# Altium PCB PCB_STM32.PcbDoc
Units mm, origin at the board's own origin, x right, y up, seen from the top; angles counter-clockwise.
Board outline 37 x 38 mm, 4 copper layers (L1(Signal), L2(GND), L3(GND), L4(Signal)), stack 1.57 mm thick; 35 components, 28 nets, 170 pads, 132 vias.
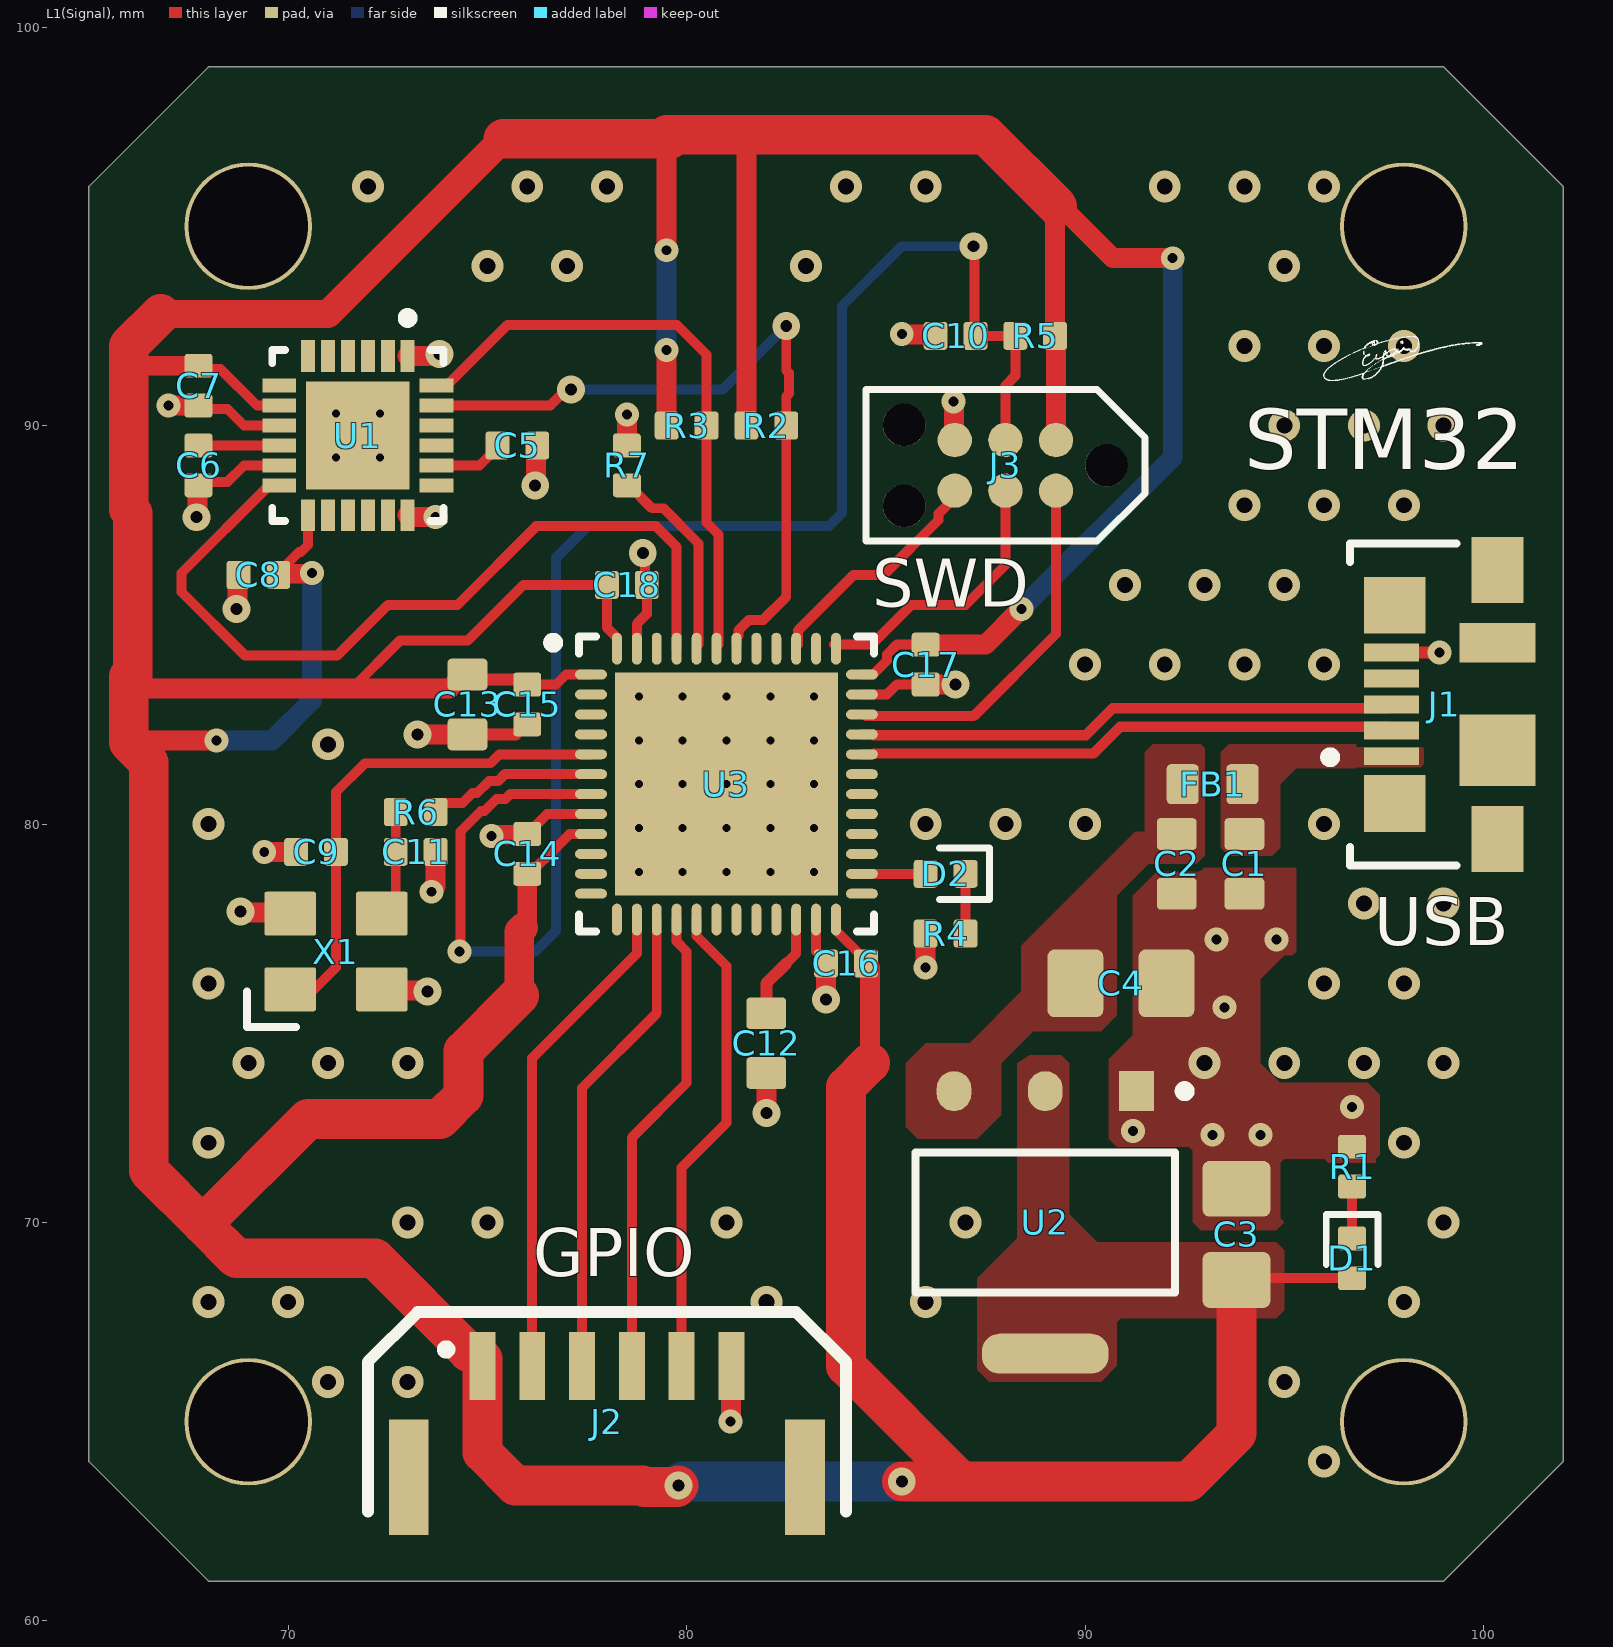
[diagram p0: L1(Signal) view]
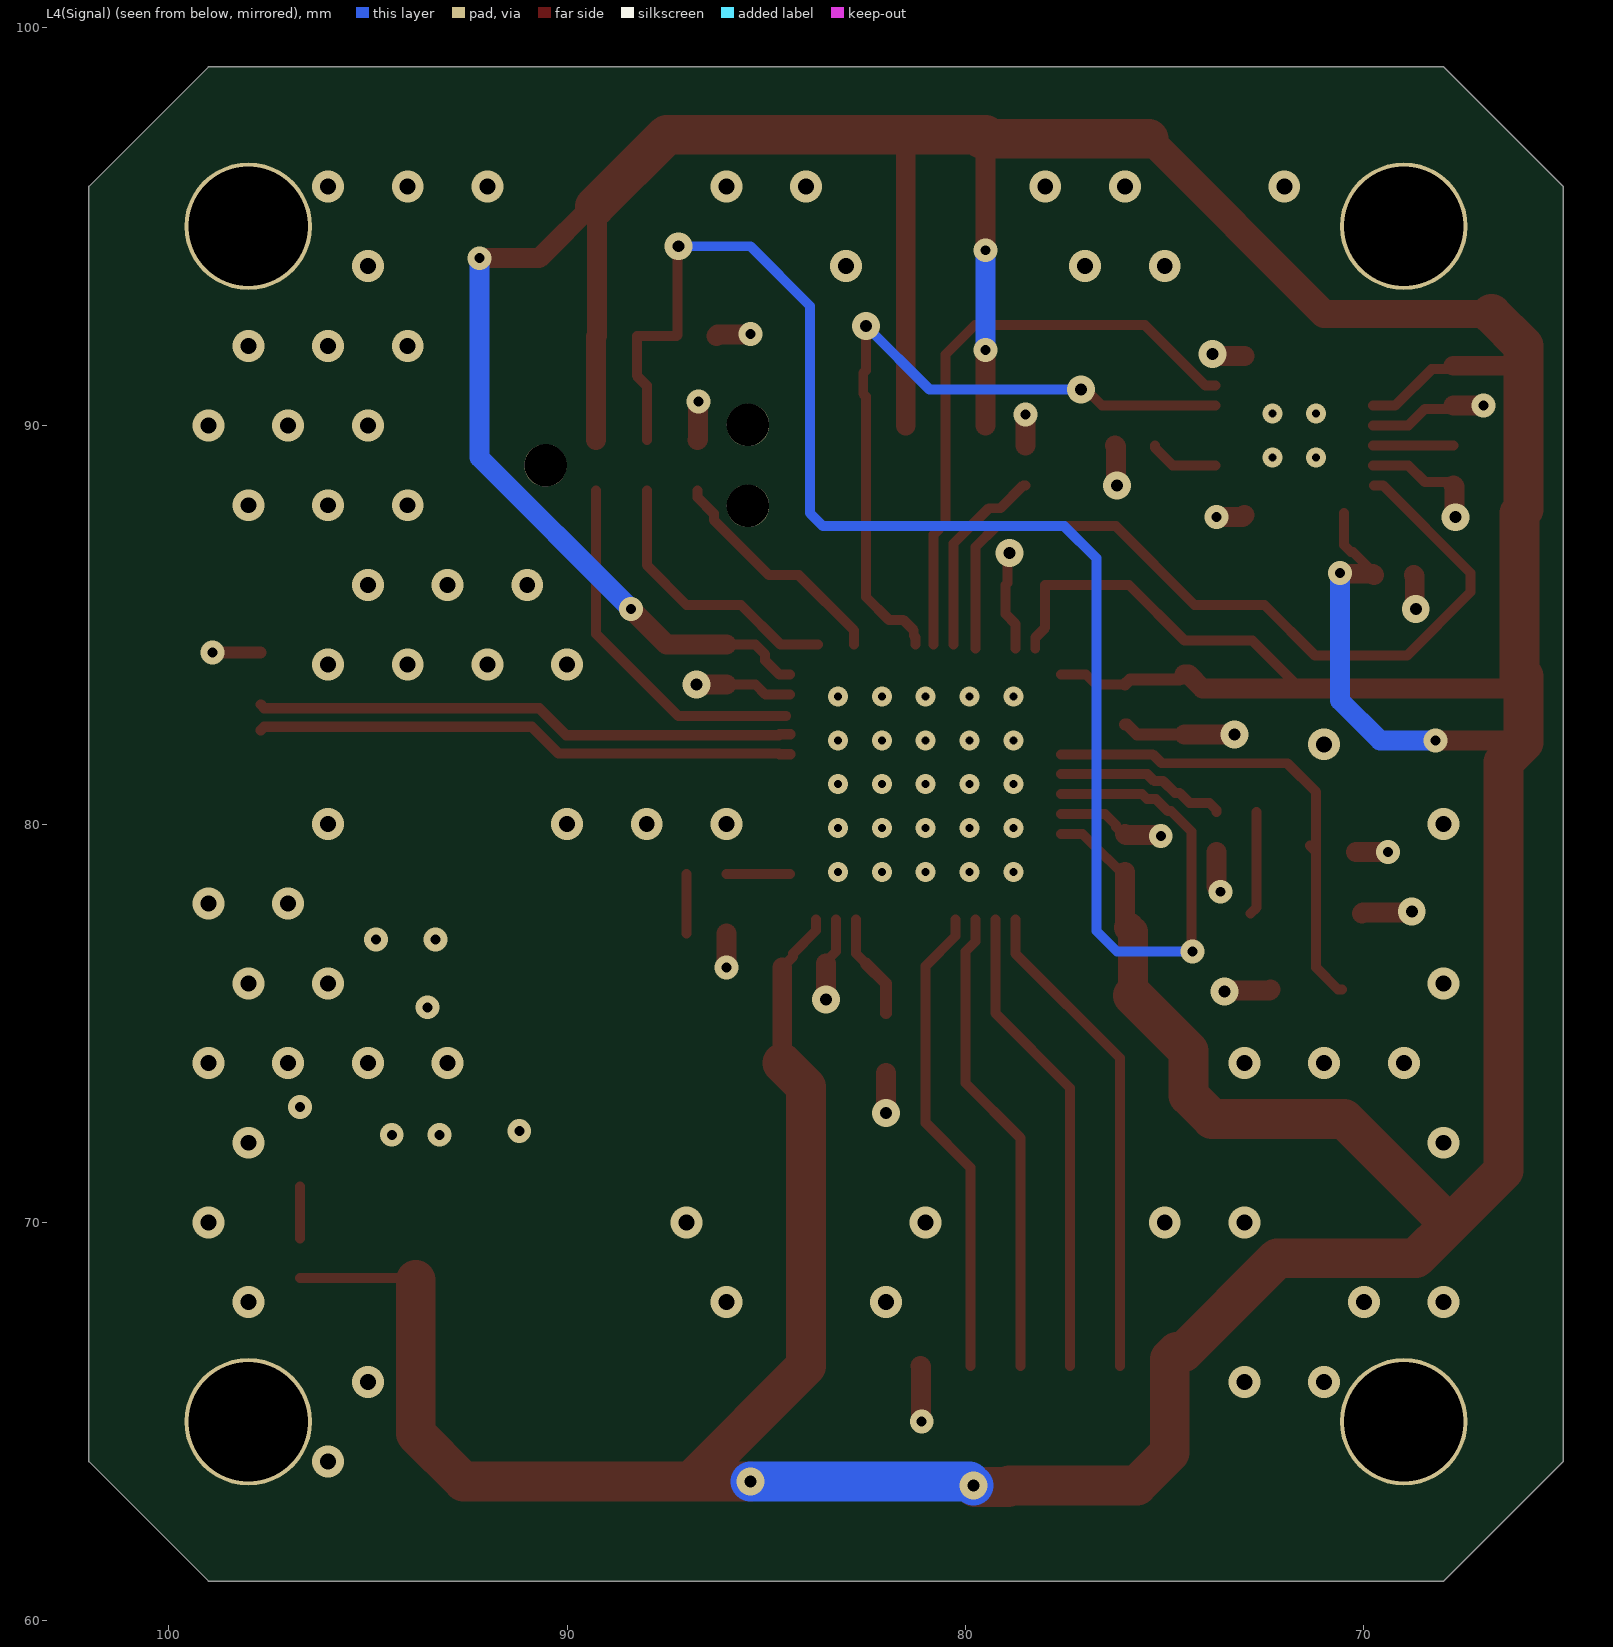
[diagram p1: L4(Signal) view, seen from below]
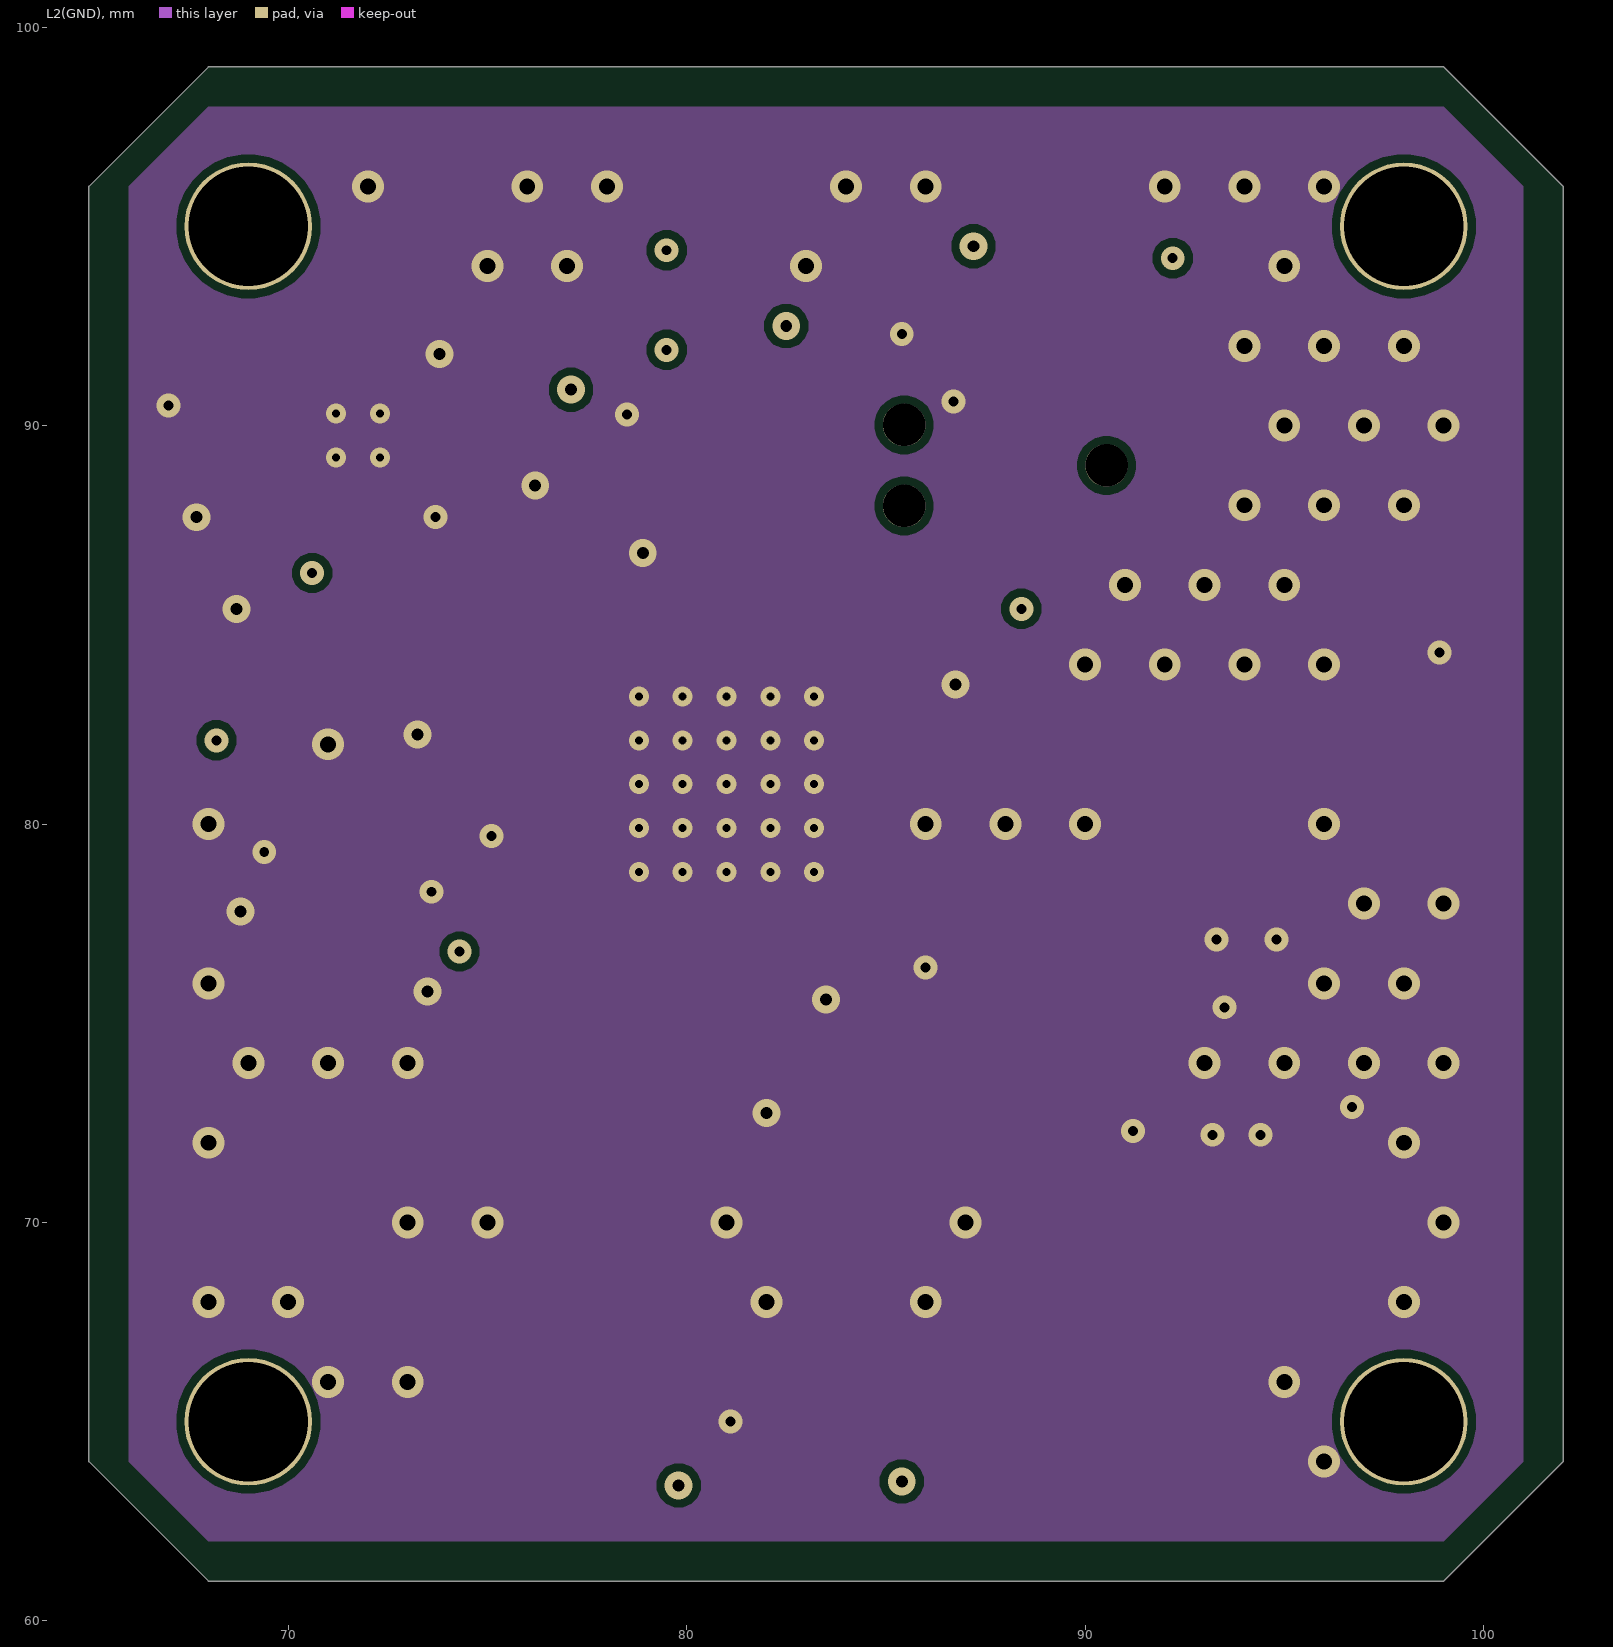
[diagram p2: L2(GND)]
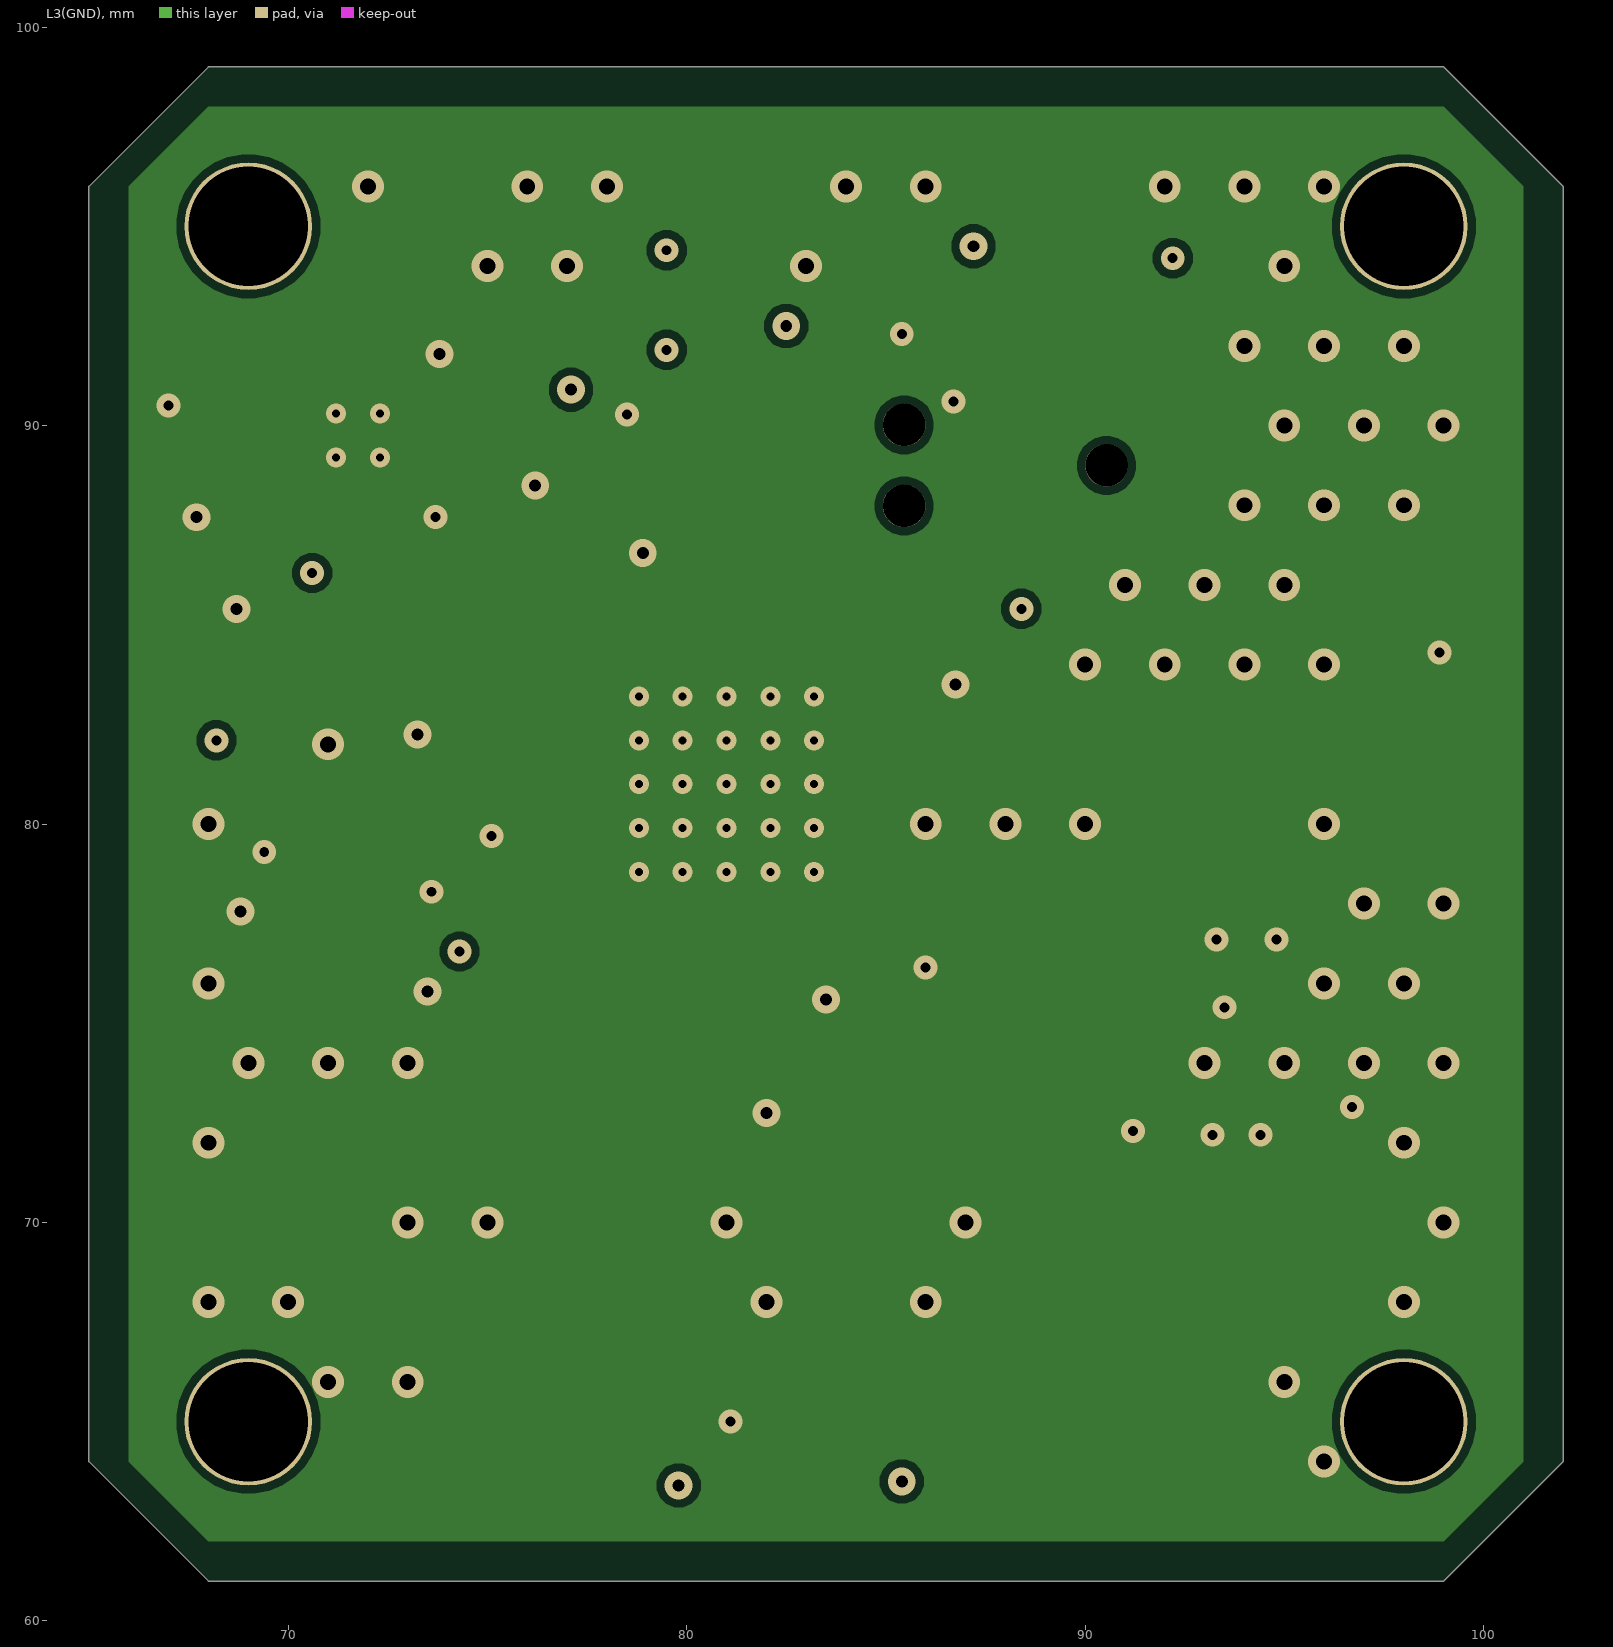
[diagram p3: L3(GND)]
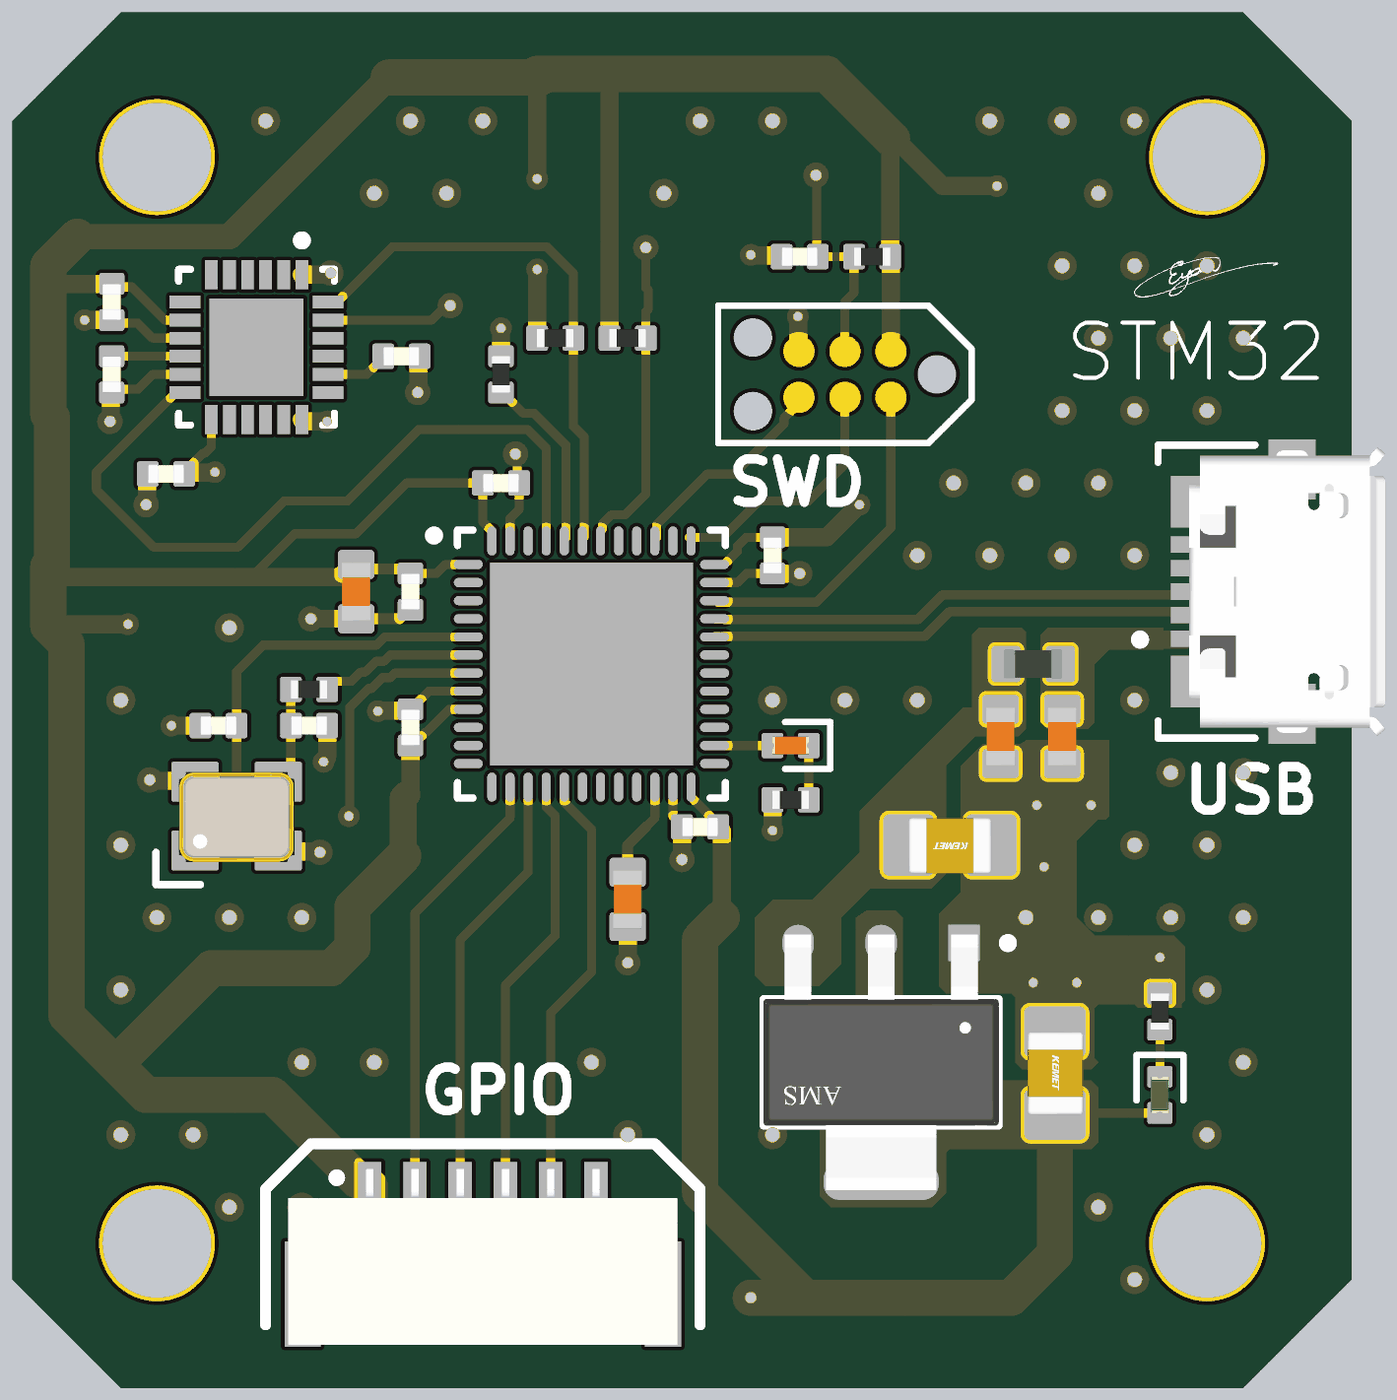
[diagram p4: 3D render of the assembled board from above, using the file's embedded part models]

## Layer stack, top to bottom
Top Solder: solder mask 0.035, SM-001, Dk 4
L1(Signal): signal copper 0.035
Dielectric 1: prepreg 0.2, PP-017, Dk 4.6
L2(GND): signal copper 0.0175
Dielectric 3: core 1.065, Core-039, Dk 4.6
L3(GND): signal copper 0.0175
Dielectric 5: prepreg 0.2, PP-017, Dk 4.6
L4(Signal): signal copper 0.035
Bottom Solder: solder mask 0.035, SM-001, Dk 4

## Board outline
65,64 65,96 68,99 99,99 102,96 102,64 99,61 68,61

## Design rules (kind name [scope] priority, off if disabled: settings)
Clearance [All] p1: gap=0.2 ignorepadtopadclearanceinfootprint=FALSE
DiffPairsRouting [All] p1: maxlimit=0.254 minlimit=0.203 mostfreqgap=0.254 toplayer_maxgap=0.203 toplayer_prefgap=0.203 toplayer_minwidth=0.26 toplayer_maxwidth=0.26 toplayer_prefwidth=0.26 midlayer1_mingap=0.254 midlayer1_minwidth=0.381 midlayer1_maxwidth=0.381 midlayer1_prefwidth=0.381 midlayer2_mingap=0.254 midlayer2_minwidth=0.381 midlayer2_maxwidth=0.381 midlayer2_prefwidth=0.381 bottomlayer_maxgap=0.203 bottomlayer_prefgap=0.203 bottomlayer_minwidth=0.26 bottomlayer_maxwidth=0.26 bottomlayer_prefwidth=0.26 maxuncoupledlength=12.7
PolygonConnect [All] p1: connectstyle=Direct reliefconductorwidth=0.254 reliefentries=4 polygonreliefangle="90 Angle" airgapwidth=0.254
RoutingVias [All] p1: holewidth=0.3 width=0.7 viastyle="Through Hole" minholewidth=0.25 minwidth=0.55 maxholewidth=0.4 maxwidth=0.9
SolderMaskExpansion [All] p1: expansion=0.102 istentingtop=FALSE
SupplyNets "Schematic Supply Nets_4" [InNet('+3.3 V')] p1: voltage=0.000
SupplyNets "Schematic Supply Nets_3" [InNet('VBUS')] p2: voltage=0.000
SupplyNets "Schematic Supply Nets_2" [InNet('GND')] p3: voltage=0.000
SupplyNets "Schematic Supply Nets_1" [InNet('+3.3v')] p4: voltage=0.000
SupplyNets "Schematic Supply Nets" [InNet('+5V')] p5: voltage=0.000
UnRoutedNet [All] p1: checkbadconnections=TRUE
Width [All] p1: maxlimit=1 minlimit=0.2 preferedwidth=0.3 midlayer1_minwidth=0.254 midlayer1_maxwidth=0.254 midlayer1_prefwidth=0.254 midlayer2_minwidth=0.254 midlayer2_maxwidth=0.254 midlayer2_prefwidth=0.254 minimp=50.000000 maximp=50.000000 favimp=50.000000
28 further rules are at their usual default settings.

## Classes and differential pairs
differential pair "USB D": +"USB D_P" -"USB D_N"

## Components (designator, comment, footprint, x,y, rotation, side; value= is the part's Value field where it differs from the comment)
C1 "2.2u" CAP_0603 94,79 r90 top
C2 "2.2u" CAP_0603 92.3,79 r90 top
C3 "22u" CAP_0805 93.8,69.7 r270 top
C4 "22u" CAP_0805 90.9,76 r180 top
C5 "2.2n" CAP_0402 75.75,89.5 r180 top
C6 "100n" CAP_0402 67.75,89 r90 top
C7 "10n" CAP_0402 67.75,91 r90 top
C8 "100n" CAP_0402 69.25,86.25 r0 top
C9 "10p" CAP_0402 70.7,79.3 r0 top
C10 "100n" CAP_0402 86.75,92.25 r0 top
C11 "10p" CAP_0402 73.2,79.3 r180 top
C12 "2.2u" CAP_0603 82,74.5 r90 top
C13 "2.2u" CAP_0603 74.5,83 r90 top
C14 "100n" CAP_0402 76,79.25 r270 top
C15 "100n" CAP_0402 76,83 r90 top
C16 "100n" CAP_0402 84,76.5 r0 top
C17 "100n" CAP_0402 86,84 r90 top
C18 "100n" CAP_0402 78.5,86 r180 top
D1 "GREEN" LED_0402_GREEN 96.7,69.1 r90 top
D2 "RED" LED_0402_RED 86.5,78.75 r0 top
FB1 "120R" FB_0603 93.2,81 r180 top
J1 "473460001" FP-473460001-MFG 100,83 r90 top
J2 "SM06B-GHS-TB" SM06B-GHS-TB 78,65 r0 top
J3 "TC2030-NL" TC2030-NL-FP 88,89 r180 top
R1 "1k" RES_0402 96.7,71.4 r270 top
R2 "2.2k" RES_0402 82,90 r180 top
R3 "2.2k" RES_0402 80,90 r180 top
R4 "1k" RES_0402 86.5,77.25 r0 top
R5 "10k" RES_0402 88.75,92.25 r0 top
R6 "10k" RES_0402 73.2,80.3 r180 top
R7 "10k" RES_0402 78.5,89 r270 top
U1 "MPU-6050" IS-QFN-24_V 71.75,89.75 r270 top
U2 "AMS1117-3.3" FP-AMS1117-IPC_C 89,70 r270 top
U3 "STM32F411CEU6" STM-UFQFPN48_L 81,81 r0 top
X1 "24MHz" XTAL_3225 71.2,76.8 r0 top

## Footprints (in the part's own frame and the unit in brackets; to place one, negate y for a bottom-side part, rotate by r counter-clockwise, add the part's x,y. Pads: shape width x height; smd on the part's side, far side on the other; paste and mask are expansions set on the pad)
CAP_0402 [mm]
  rrect25% 0.6x0.7 smd: 1(-0.5,0) 2(0.5,0)
  body extent -0.5,-0.26 0.5,0.26, height 0.37
CAP_0603 [mm]
  rrect25% 0.8x1 smd: 1(-0.75,0) 2(0.75,0)
  body extent -0.8,-0.4 0.8,0.4, height 0.51
CAP_0805 [mm]
  rrect25% 1.4x1.7 smd: 1(-1.143,0) 2(1.143,0)
  body extent -1.15,-0.76 1.15,0.79, height 1.01
FB_0603 [mm]
  rrect25% 0.8x1 smd: 1(-0.75,0) 2(0.75,0)
  body extent -0.8,-0.4 0.8,0.4, height 0.81
FP-473460001-MFG [mm]
  rect 0.45x1.38 smd paste+0 mask+0: 1(-1.3,2.31) 2(-0.65,2.31) 3(0,2.31) 4(0.65,2.31) 5(1.3,2.31)
  rect 1.425x1.55 smd paste+0 mask+0: 6(-2.488,2.225) 7(2.488,2.225)
  rect 1.65x1.3 smd paste+0 mask+0: 8(-3.375,-0.35) 11(3.375,-0.35)
  rect 1.8x1.9 smd paste+0 mask+0: 9(-1.15,-0.35)
  rect 1x1.9 smd paste+0 mask+0: 10(1.55,-0.35)
  silkscreen extent -4.05,0.67 4.05,3.97, body extent -4.3,-2.48 4.3,3.45, height 0.25
FP-AMS1117-IPC_C [mm]
  rect 1.004x0.872 smd paste+0 mask+0: 1(-3.295,2.29)
  rrect100% 1.004x0.872 smd paste+0 mask+0: 2(-3.295,0) 3(-3.295,-2.29)
  rrect87% 1.004x3.182 smd paste+0 mask+0: 4(3.295,0)
  silkscreen extent -3.42,-3.25 1.75,3.63, body extent -3.9,-3.35 3.9,3.35, height 0.25
IS-QFN-24_V [mm] "QFN, 24-Leads, Body 4x4mm, Pitch 0.5mm, Thermal Pad 2.7x2.6mm"
  rect 0.8x0.35 smd: 1(-2,1.25) 2(-2,0.75) 3(-2,0.25) 4(-2,-0.25) 5(-2,-0.75) 6(-2,-1.25) 13(2,-1.25) 14(2,-0.75) 15(2,-0.25) 16(2,0.25) 17(2,0.75) 18(2,1.25)
  rect 0.35x0.85 smd mask+0.102: 7(-1.25,-1.975) 8(-0.75,-1.975) 9(-0.25,-1.975) 10(0.25,-1.975) 11(0.75,-1.975) 12(1.25,-1.975) 19(1.25,1.975) 20(0.75,1.975) 21(0.25,1.975) 22(-0.25,1.975) 23(-0.75,1.975) 24(-1.25,1.975)
  rect 2.7x2.6 smd: 25(0,0)
  silkscreen extent -3.07,-2.15 2.15,2.15, body extent -2,-2 2,2, height 0.95
LED_0402_GREEN [mm]
  rrect25% 0.6x0.7 smd: A(-0.5,0) K(0.5,0)
  silkscreen extent -0.15,-0.65 1.1,0.65, body extent -0.51,-0.25 0.51,0.25, height 0.45
LED_0402_RED [mm]
  rrect25% 0.6x0.7 smd: A(-0.5,0) K(0.5,0)
  silkscreen extent -0.15,-0.65 1.1,0.65, body extent -0.51,-0.25 0.51,0.25, height 0.45
RES_0402 [mm]
  rrect25% 0.6x0.7 smd: 1(-0.5,0) 2(0.5,0)
  body extent -0.5,-0.25 0.5,0.25, height 0.3
SM06B-GHS-TB [mm]
  rect 0.65x1.7 smd: 1(-3.125,1.4) 2(-1.875,1.4) 3(-0.625,1.4) 4(0.625,1.4) 5(1.875,1.4) 6(3.125,1.4)
  rect 1x2.9 smd: ""(-4.975,-1.4) ""(4.975,-1.4)
  silkscreen extent -6,-2.25 6,2.75, body extent -5.38,-2.8 5.38,2.05, height 4.26
STM-UFQFPN48_L [mm] "QFN, 48-Leads, Body 7.1x7.1mm, Pitch 0.5mm, Thermal Pad 5.6x5.6mm, IPC High Density"
  oval 0.8x0.25 smd: 1(-3.4,2.75) 2(-3.4,2.25) 3(-3.4,1.75) 4(-3.4,1.25) 5(-3.4,0.75) 6(-3.4,0.25) 7(-3.4,-0.25) 8(-3.4,-0.75) 9(-3.4,-1.25) 10(-3.4,-1.75) 11(-3.4,-2.25) 12(-3.4,-2.75) 25(3.4,-2.75) 26(3.4,-2.25) 27(3.4,-1.75) 28(3.4,-1.25) 29(3.4,-0.75) 30(3.4,-0.25) 31(3.4,0.25) 32(3.4,0.75) 33(3.4,1.25) 34(3.4,1.75) 35(3.4,2.25) 36(3.4,2.75)
  oval 0.25x0.8 smd: 13(-2.75,-3.4) 14(-2.25,-3.4) 15(-1.75,-3.4) 16(-1.25,-3.4) 17(-0.75,-3.4) 18(-0.25,-3.4) 19(0.25,-3.4) 20(0.75,-3.4) 21(1.25,-3.4) 22(1.75,-3.4) 23(2.25,-3.4) 24(2.75,-3.4) 37(2.75,3.4) 38(2.25,3.4) 39(1.75,3.4) 40(1.25,3.4) 41(0.75,3.4) 42(0.25,3.4) 43(-0.25,3.4) 44(-0.75,3.4) 45(-1.25,3.4) 46(-1.75,3.4) 47(-2.25,3.4) 48(-2.75,3.4)
  rect 5.6x5.6 smd: 49(0,0)
  silkscreen extent -4.47,-3.7 3.7,3.7, body extent -3.55,-3.55 3.55,3.55, height 0.6
TC2030-NL-FP [mil]
  round 33.98 smd paste-16.99: 1(-50,-25) 2(-50,25) 3(0,-25) 4(0,25) 5(50,-25) 6(50,25)
  round 42.01 hole 42.01 unplated: MH(-100,0) MH(100,-40) MH(100,40)
  silkscreen extent -138,-75 138,75
XTAL_3225 [mm]
  rrect10% 1.3x1.1 smd: 1(-1.15,-0.95) 2(1.15,-0.95) 3(1.15,0.95) 4(-1.15,0.95)
  silkscreen extent -2.23,-1.89 -1,-1, body extent -1.6,-1.28 1.6,1.22, height 0.61

## Part data
C1 C2 C12 C13: library part CAP_0603, "Capacitor SMD 0603"
C3 C4: library part CAP_0805, "Capacitor SMD 0805"
C5 C6 C7 C8 C9 C10 C11 C14 C15 C16 C17 C18: library part CAP_0402, "Capacitor SMD 0402"
D1: library part LED_0402_GREEN, "LED 0402 GREEN SMD"
D2: library part LED_0402_RED, "LED 0402 RED SMD"
FB1: library part FB_0603, "Ferrite Bead SMD 0603"
J1: library part CMP-2000-05246-2, "CONN RCPT USB2.0 MICRO B SMD R/A", Current Rating=1.8A, Manufacturer=Molex, Package=0, Temperature="-30°C to +85°C", Temperature Range High=+85°C, Temperature Range Low=-30°C, Voltage Rating=30V, Automotive=No, Category=Conn, ComponentLink2Description=Datasheet, ComponentLink2URL=https://www.molex.com/webdocs/datasheets/pdf/en-us/0473460001_IO_CONNECTORS.pdf, Conn Orientation="Right Angle", Contact Material=Gold,Nickel, Device Class L1=Connectors, Device Class L2="USB Connectors", Device Class L3=unset, Digikey Description="CONN RCPT USB2.0 MICRO B SMD R/A", Footprint Url=https://www.molex.com/pdm_docs/sd/473460001_sd.pdf, Height=2.945mm, Is Female=yes, Lead Free=Yes, Manufacturer Part Number=473460001, Number Of Contacts=5, Octopart=https://octopart.com/47346-0001-molex-7164928, Pitch=0.65mm, RoHS=TRUE, Shielding=true, Usb Standard="USB 2.0"
J2: "Header Connector 6 Position 1.25MM Pitch SMD Horizontal JST GH", Manufacturer=JST, Manufacturer Part Number=SM06B-GHS-TB
J3: "Tag-Connect No-Solder SWD Debug Connector (No Legs) DO NOT PLACE", Manufacturer=Tag-Connect, Manufacturer Part Number=TC2030-NL-FP
R1 R2 R3 R4 R5 R6 R7: library part RES_0402, "Resistor SMD 0402"
U1: library part CMP-1753-00002-2, "3-Axis Gyroscope, Accelerometer and a Digital Motion Processor(TM) (DMP), 2.375 to 3.46 V, -40 to 85 degC, 24-Pin QFN, RoHS, Tape and Reel", Manufacturer=InvenSense, Standard Package=5,000, Category=Sensors,Transducers, Datasheet URL=http://datasheet.octopart.com/MPU-6050-InvenSense-datasheet-14421344.pdf, Datasheet Version="Rev. 3.3, 05/2012", Dynamic Catalog=MPU-6000™Series, Family=Multifunction, Featured Product=MPU-60506-Axis,IntegratedI²CSolution, Manufacturer URL=http://www.invensense.com/, Online Catalog=MPU-6000™Series, Other Names="1428-1007-2 / MPU6050", Output Type=Digital, Sensor Type=MotionTracking, Unit PriceUSD=Digital
U2: library part CMP-209535-000001-1, "LDO Voltage Regulators 1A, 3.3V", Dropout Voltage=1.1V, Manufacturer="Advanced Monolithic Systems", Max Junction Temp=+125°C, Max Power Dissipation=1.2W, Max Supply Voltage=15V, Nominal Supply Current=5mA, Output Current=1A, Output Voltage=3.3V, Package=AMS1117, Temperature="-40°C to +125°C", Temperature Range Low=-40°C, Automotive=No, Category=IC, ComponentLink2Description=Datasheet, ComponentLink2URL=http://www.advanced-monolithic.com/pdf/ds1117.pdf, Device Class L1="Integrated Circuits (ICs)", Device Class L2="Power Management ICs", Device Class L3="Voltage Regulators - Linear", Height=1.8mm, Ipc Land Pattern Name=SOT229P700X180-4, Lead Free=Yes, Manufacturer Part Number=AMS1117-3.3, Number Of Outputs=1, Octopart=https://octopart.com/ams1117-3.3-advanced+monolithic+systems-25899300, Output Type=Fixed, RoHS=TRUE, Standoff Height=0.64mm, Temperature Range High=+125°C
U3: library part CMP-0243-00165-1, "ARM Cortex-M4 32-bit MCU+FPU, 512 KB Flash, 128 KB RAM, 36 I/Os, 48-Pin UFQFPN, -40 to 85 degC, Tray", I/Os (High Current)=36, Operating Frequency(F) (Processor speed) (MHz)=100, Package Description=UFQFPN48, Package Reference="48-Pin Ultra Thin Fine Pitch Quad Flat No-Lead, 7 x 7 x 0.6 mm Body, 0.5 mm Pitch, Exposed Pad", Supply Voltage(Vcc) min (V)=1.7, ComponentLink1Description="Manufacturer URL", ComponentLink1URL=http://www.st.com/, ComponentLink2Description=Datasheet, ComponentLink2URL=http://www.st.com/st-web-ui/static/active/en/resource/technical/document/datasheet/DM00115249.pdf, Core="ARM Cortex-M4", DatasheetVersion="Rev. 6", FLASH Size (Prog) (kB)=512, Internal RAM Size (kB)=128, Mounting Technology="Surface Mount", Packing=Tray
X1: library part TSX-3225_24.0000MF15X-AC, "Crystal SMD 24MHz 10PPM 7pF 3225", Manufacturer=Epson, Manufacturer Part Number="TSX-3225 24.0000MF15X-AC"

## Free pads (board coordinates)
  round 3.2 hole 3 unplated paste-2539.97: 1(69,95) 2(98,95) 3(98,65) 4(69,65)

## Via types
v1: diameter 0.8, hole 0.4, L1(Signal) to L4(Signal), tented both sides, 62 vias
v2: diameter 0.5, hole 0.2, L1(Signal) to L4(Signal), 29 vias
v3: diameter 0.6, hole 0.25, L1(Signal) to L4(Signal), tented both sides, 25 vias
v4: diameter 0.7, hole 0.3, L1(Signal) to L4(Signal), tented both sides, 16 vias

## Nets (pads, with @x,y where several pads share a name; then routed paths per layer and width w, separated by ;. In a path a pad name is that pad's centre, name@x,y a point inside that pad or via, vN(x,y) a via of type N, cw(c..) or ccw(c..) an arc to the next point about the centre after c; other vN are vias at no path point)
"+3.3 V": 
+3.3v: C3.2 C7.2 C8.2 C13.2 C14.2 C15.2 C16.2 C17.2 C18.2 D1.A J2.1 J3.1 R2.2 R3.2 R5.2 U1.8 U1.13 U2.2 U2.4 U3.1 U3.9 U3.24 U3.36 U3.48 | length 193.8
  L1(Signal) w0.25: C7.2 67.836,91.414 68.301,91.414 69.215,90.5 U1.8 ; C8.2 69.75,86.3 70.273,86.823 70.323,86.823 70.5,87 U1.13@70.5,87.8 ; 71.6,83.4 72.8,84.6 74.5,84.6 75.9,86 C18.2 78,84.925 78.25,84.675 U3.48 ; C15.2 76.725,83.5 76.975,83.75 U3.1 ; C14.2@76.05,78.75 76.425,79.125 76.441,79.125 77.066,79.75 U3.9 ; U3.24 83.75,77.325 84.325,76.75 84.325,76.675 C16.2 ; U3.36 84.675,83.75 85.029,84.104 85.029,84.254 85.275,84.5 C17.2 ; C3.2@93.9,68.6 D1.A
  L1(Signal) w0.3: 66.1,83.7 66.15,83.75 ; C13.2 74.625,83.625 75.875,83.625 C15.2
  L1(Signal) w0.5: 66,82.1 v3(68.2,82.1) ; 66,83.4 71.6,83.4 74.05,83.4 74.4,83.75 C13.2 ; 66,91.6 66.1,91.5 C7.2 ; C8.2 69.781,86.281 70.581,86.281 v3(70.6,86.3) ; 75.9,77.4 76,77.5 C14.2 C14.2@76,78.8 ; R3.2 v3(79.5,91.9) ; v3(79.5,94.4) 79.5,97.3 ; 81.46,97.34 81.5,97.3 R2.2 ; 84.6,74 C16.2@84.6,76.4 ; C17.2 87.5,84.5 v3(88.4,85.4) ; 89.2,95.5 89.25,95.45 R5.2 ; J3.1 R5.2@89.27,92.23 ; 89.3,95.6 90.7,94.2 v3(92.2,94.2)
  L1(Signal) w0.7: 66.8,92.8 71,92.8 ; 71.05,92.85 75.4,97.2
  L1(Signal) w0.75: 75.8,75.7 75.8,77.3 75.9,77.4
  L1(Signal) w1: 66,83.7 66,83.4 66,82.1 66,82.05 66.5,81.55 66.5,71.3 67.85,69.95 ; 66.1,83.7 66.1,87.8 66,87.9 66,91.6 66,92 66.8,92.8 ; 75.4,97.2 79.6,97.2 ; 75.8,75.7 74.4,74.3 74.4,73.186 73.814,72.6 70.5,72.6 67.85,69.95 ; 79.5,97.3 81.5,97.3 87.5,97.3 89.3,95.5 ; v4(79.8,63.4) 79.764,63.364 78.936,63.364 78.9,63.4 75.7,63.4 74.875,64.225 J2.1 74.875,66.575 74.7,66.75 74.525,66.75 72.175,69.1 68.7,69.1 67.85,69.95 ; 84.6,74 84,73.4 84,66.4 86.9,63.5 ; v4(85.4,63.5) 86.9,63.5 ; C3.2 93.8,64.7 92.6,63.5 86.9,63.5
  L4(Signal) w0.5: v3(68.2,82.1) 69.6,82.1 70.6,83.1 v3(70.6,86.3) ; v3(79.5,91.9) v3(79.5,94.4) ; v3(88.4,85.4) 92.2,89.2 v3(92.2,94.2)
  L4(Signal) w1: v4(79.8,63.4) 79.9,63.5 v4(85.4,63.5)
+5V: C2.2 C4.2 FB1.2 U2.3
GND: C1.1 C2.1 C3.1 C4.1 C5.1 C6.1 C7.1 C8.1 C9.1 C10.1 C11.1 C12.1 C13.1 C14.1 C15.1 C16.1 C17.1 C18.1 J1.5 J2.6 J3.5 R1.1 R4.1 R7.1 U1.1 U1.9 U1.11 U1.18 U1.25 U2.1 U3.8 U3.23 U3.35 U3.47 U3.49 X1.2 X1.4 | length 33.5
  L1(Signal) w0.25: C6.1 67.838,88.588 68.475,88.588 68.887,89 U1.11 ; C7.1 67.837,90.413 68.475,90.413 68.888,90 U1.9 ; C14.1@76.05,79.75 76.225,79.925 76.225,79.975 76.5,80.25 U3.8 ; U3.47 78.75,85.025 79,85.275 C18.1 78.95,86.05 78.95,86.75 v4(78.9,86.8) ; U3.23 83.25,76.8 83.5,76.55 C16.1 ; U3.35 85.025,83.25 85.275,83.5 C17.1
  L1(Signal) w0.3: C13.1 75.7,82.25 75.95,82.5 C15.1 ; J1.5 v3(98.9,84.3)
  L1(Signal) w0.5: v3(67,90.5) C7.1 ; v4(67.7,87.7) 67.725,87.725 67.725,88.475 C6.1 ; v4(68.7,85.4) 68.725,85.425 68.725,86.225 C8.1 ; v4(68.8,77.8) 68.825,77.775 70.025,77.775 X1.4 ; v3(69.4,79.3) C9.1 ; X1.2 72.375,75.825 73.475,75.825 v4(73.5,75.8) ; U1.18 73.05,87.7 v3(73.7,87.7) ; U1.1 73.696,91.75 73.746,91.8 v4(73.8,91.8) ; v4(73.25,82.25) C13.1 ; v3(73.6,78.3) 73.6,78.327 73.7,78.427 C11.1 ; v3(75.1,79.7) 75.119,79.719 75.969,79.719 C14.1 ; v4(76.2,88.5) 76.225,88.525 76.225,89.475 C5.1 ; R7.1 v3(78.5,90.275) ; v3(81.1,65) 81.112,65.012 81.112,66.387 J2.6 ; v4(82,72.75) C12.1 ; v4(83.5,75.6) C16.1 ; v3(85.4,92.3) 85.419,92.281 86.219,92.281 C10.1 ; v3(86,76.4) R4.1 ; C17.1 v4(86.75,83.5) ; v3(86.7,90.6) 86.715,90.585 86.715,89.65 J3.5
  other v1: 96,64 71,66 73,66 95,66 68,68 70,68 82,68 86,68 98,68 73,70 75,70 81,70 87,70 99,70 68,72 98,72 69,74 71,74 73,74 93,74 95,74 97,74 99,74 68,76 96,76 98,76 97,78 99,78 68,80 86,80 88,80 90,80 96,80 71,82 90,84 92,84 94,84 96,84 91,86 93,86 95,86 94,88 96,88 98,88 95,90 97,90 99,90 94,92 96,92 98,92 75,94 77,94 83,94 95,94 72,96 76,96 78,96 84,96 86,96 92,96 94,96 96,96
  other v2: 78.8,78.8 79.9,78.8 81,78.8 82.1,78.8 83.2,78.8 78.8,79.9 79.9,79.9 81,79.9 82.1,79.9 83.2,79.9 78.8,81 79.9,81 81,81 82.1,81 83.2,81 78.8,82.1 79.9,82.1 81,82.1 82.1,82.1 83.2,82.1 78.8,83.2 79.9,83.2 81,83.2 82.1,83.2 83.2,83.2 71.2,89.2 72.3,89.2 71.2,90.3 72.3,90.3
  other v3: 93.2,72.2 94.4,72.2 91.2,72.3 96.7,72.9 93.5,75.4 93.3,77.1 94.8,77.1
"IMU CPOUT": C5.2 U1.20 | length 1.8
  L1(Signal) w0.25: U1.20 74.8,89 75.25,89.45 C5.2
"IMU INT": U1.12 U3.45 | length 21
  L1(Signal) w0.25: U1.12@69.75,88.5 69.525,88.5 67.325,86.3 67.325,85.82 68.92,84.225 71.225,84.225 72.5,85.5 74.25,85.5 76.225,87.475 79.23,87.475 79.75,86.955 U3.45
"IMU REGOUT": C6.2 U1.10 | length 2
  L1(Signal) w0.25: C6.2 U1.10
"IMU SCL": R2.1 U1.23 U3.42 | length 18.4
  L1(Signal) w0.25: U1.23 76.578,90.5 76.978,90.9 v4(77.1,90.9) ; U3.42@81.25,84.5 81.25,84.675 81.3,84.725 81.3,84.861 81.564,85.125 81.925,85.125 82.5,85.7 R2.1 82.5,90.732 82.567,90.799 82.567,91.317 82.5,91.384 v4(82.5,92.5)
  L4(Signal) w0.25: v4(77.1,90.9) 80.9,90.9 v4(82.5,92.5)
"IMU SDA": R3.1 U1.24 U3.43 | length 15.1
  L1(Signal) w0.25: U1.24 73.975,91 75.5,92.525 79.759,92.525 80.5,91.784 R3.1 80.5,87.566 80.8,87.266 U3.43@80.8,84.5
"LED POWER K": D1.K R1.2 | length 1.3
  L1(Signal) w0.25: D1.K R1.2
"MCU BOOT0": R7.2 U3.44 | length 4.9
  L1(Signal) w0.25: R7.2 78.55,88.5 79.125,87.925 79.416,87.925 80.3,87.041 U3.44@80.3,84.5
"MCU NRST": C10.2 J3.3 R5.1 U3.7 | length 41.4
  L1(Signal) w0.25: v3(74.3,76.8) 74.325,76.825 74.325,79.809 74.841,80.325 74.925,80.325 75.225,80.625 75.449,80.625 75.574,80.75 U3.7 ; v4@87.25,94.5 87.225,94.475 87.225,92.275 C10.2 R5.1 88.25,91.25 88,91 J3.3
  L4(Signal) w0.25: v3(74.3,76.8) 76.2,76.8 76.717,77.317 76.717,86.671 77.52,87.475 83.575,87.475 83.9,87.8 83.9,93 85.4,94.5 v4(87.2,94.5)
"MCU OSC IN": C9.2 U3.5 X1.1 | length 12.3
  L1(Signal) w0.25: X1.1@70.55,75.85 70.65,75.85 71.2,76.4 C9.2 ; C9.2@71.359,79.459 C9.2 ; U3.5 75.301,81.75 75.076,81.525 71.925,81.525 71.2,80.8 C9.2
"MCU OSC OUT": R6.1 U3.6 | length 4.3
  L1(Signal) w0.25: R6.1 73.7,80.35 73.875,80.525 74.375,80.525 74.625,80.775 74.739,80.775 75.039,81.075 75.262,81.075 75.437,81.25 U3.6
"MCU PA4": J2.2 U3.14 | length 12.3
  L1(Signal) w0.25: J2.2 76.125,74.125 78.75,76.75 U3.14
"MCU PA5": J2.3 U3.15 | length 12
  L1(Signal) w0.25: J2.3 77.375,73.375 79.25,75.25 U3.15
"MCU PA6": J2.4 U3.16 | length 11.9
  L1(Signal) w0.25: J2.4 78.625,72.125 80,73.5 80,76.802 79.75,77.052 U3.16
"MCU PA7": J2.5 U3.17 | length 12
  L1(Signal) w0.25: J2.5 79.875,71.375 81,72.5 81,76.439 80.25,77.189 U3.17
"MCU SWCLK": J3.4 U3.37 | length 7
  L1(Signal) w0.25: U3.37@83.7,84.5 84.639,84.5 85.639,85.5 87,85.5 88,86.5 J3.4
"MCU SWDIO": J3.2 U3.34 | length 9.2
  L1(Signal) w0.25: U3.34@84.5,82.705 87.205,82.705 89.27,84.77 J3.2
"MCU SWO": J3.6 U3.39 | length 5.9
  L1(Signal) w0.25: U3.39@82.8,84.5 82.8,84.861 84.183,86.245 84.935,86.245 86.318,87.628 86.318,87.788 86.73,88.199 J3.6
"MCU VCAP1": C12.2 U3.22 | length 2.7
  L1(Signal) w0.25: 82.5,76.5 82.75,76.75 U3.22
  L1(Signal) w0.3: C12.2 82,76 82.5,76.5
MCU_LED_A: D2.A U3.26 | length 1.6
  L1(Signal) w0.25: U3.26 D2.A
NetD2_K: D2.K R4.2 | length 1.5
  L1(Signal) w0.25: R4.2 D2.K
"USB D_N": J1.2 U3.32 | length 13.6
  L1(Signal) w0.26: U3.32 84.665,81.75 84.684,81.769 90.21,81.769 90.885,82.444 97.596,82.444 J1.2
"USB D_P": J1.3 U3.33 | length 13.6
  L1(Signal) w0.26: U3.33 84.665,82.25 84.684,82.232 90.019,82.232 90.694,82.906 97.597,82.906 J1.3
VBUS: C1.2 FB1.1 J1.1
"XTAL IN": C11.2 R6.2 X1.3 | length 2.6
  L1(Signal) w0.25: R6.2 C11.2 72.7,77.9 X1.3@72.85,77.75
pads on no net: J1.4 J1.6 J1.7 J1.8 J1.9 J1.10 J1.11 J2. J3.MH U1.2 U1.3 U1.4 U1.5 U1.6 U1.7 U1.14 U1.15 U1.16 U1.17 U1.19 U1.21 U1.22 U3.2 U3.3 U3.4 U3.10 U3.11 U3.12 U3.13 U3.18 U3.19 U3.20 U3.21 U3.25 U3.27 U3.28 U3.29 U3.30 U3.31 U3.38 U3.40 U3.41 U3.46

## Polygon pours and split planes (outlines as drawn)
GND on L1(Signal) "GND_L01_P016" (solid, pour order 16): 95.3,78.9 91.9,78.9 91.2,78.2 91.2,74.7 90.6,74.1 90.6,72.1 90.8,71.9 92.6,71.9 92.7,71.8 92.7,70 92.9,69.8 94.8,69.8 95,70 94.9,70.1 94.9,71.5 95,71.6 96,71.6 96.1,71.5 97.3,71.5 97.3,71.6 97.4,71.7 97.4,73.2 97.1,73.5 94.9,73.5 94.4,74 94.4,76.1 95,76.7 95.2,76.7 95.3,76.8
VBUS on L1(Signal) "VBUS_L01_P000" (solid, pour order 0): 93.6,82 93.4,81.8 93.4,79.4 93.6,79.2 94.7,79.2 94.9,79.4 94.9,81 95.3,81.4 98.4,81.4 98.5,81.5 98.5,81.9 98.4,82
+5V on L1(Signal) "+5V_L01_P001" (solid, pour order 1): 91.5,79.8 91.258,79.8 88.4,76.942 88.4,75.8 87.1,74.5 86,74.5 85.5,74 85.5,72.4 85.8,72.1 87.3,72.1 87.9,72.7 87.9,74 88.7,74.8 90.4,74.8 90.8,75.2 90.8,78.2 91.6,79 92.8,79 93,79.2 93,81.9 92.9,82 91.7,82 91.5,81.8
+3.3v on L1(Signal) "+3.3V_L01_P002" (solid, pour order 2): 88.6,74.2 88.3,74 88.3,73.7 88.3,69.6 87.3,68.6 87.3,66.3 87.6,66 90.4,66 90.8,66.4 90.8,67.5 90.9,67.6 94.8,67.6 95,67.8 95,69.3 94.8,69.5 90.3,69.5 89.6,70.2 89.6,74 89.4,74.2
GND on L2(GND) "GND_L02_P014" (solid, pour order 14): 66,96 68,98 99,98 101,96 101,64 99,62 68,62 66,64
GND on L3(GND) "GND_L03_P015" (solid, pour order 15): 66,96 68,98 99,98 101,96 101,64 99,62 68,62 66,64

## Silkscreen, mask and mechanical layers (free items; w line width, h text height)
Top Overlay:
  drawing of 3 lines, arcs and shapes, not listed
  text "STM32" at 94,88.9 h1.52
  text "SWD" at 84.654,85.454 h1.2
  text "USB" at 97.254,76.954 h1.2
  text "GPIO" at 76.154,68.654 h1.2
Mechanical 1:
  lines w0.254: 65,64 65,66 65,92 65,96 68,99 99,99 102,96 102,64 99,61 68,61 67.25,61.75 65.75,63.25 65,64

## Text inside footprints (layer, text, board x,y; h text height)
D1: Mechanical 13 "+" at 96.192,67.217 h0.5 r90
D2: Mechanical 13 "+" at 84.617,79.258 h0.5